# Altium PCB PCB1.PcbDoc
Units mil, origin at the board's own origin, x right, y up, seen from the top; angles counter-clockwise.
Board outline 6225 x 2457.36 mil, 2 copper layers (Top Layer, Bottom Layer); 191 components, 160 nets, 644 pads, 2 vias.
Unrouted connection lines stored in the file: 416.
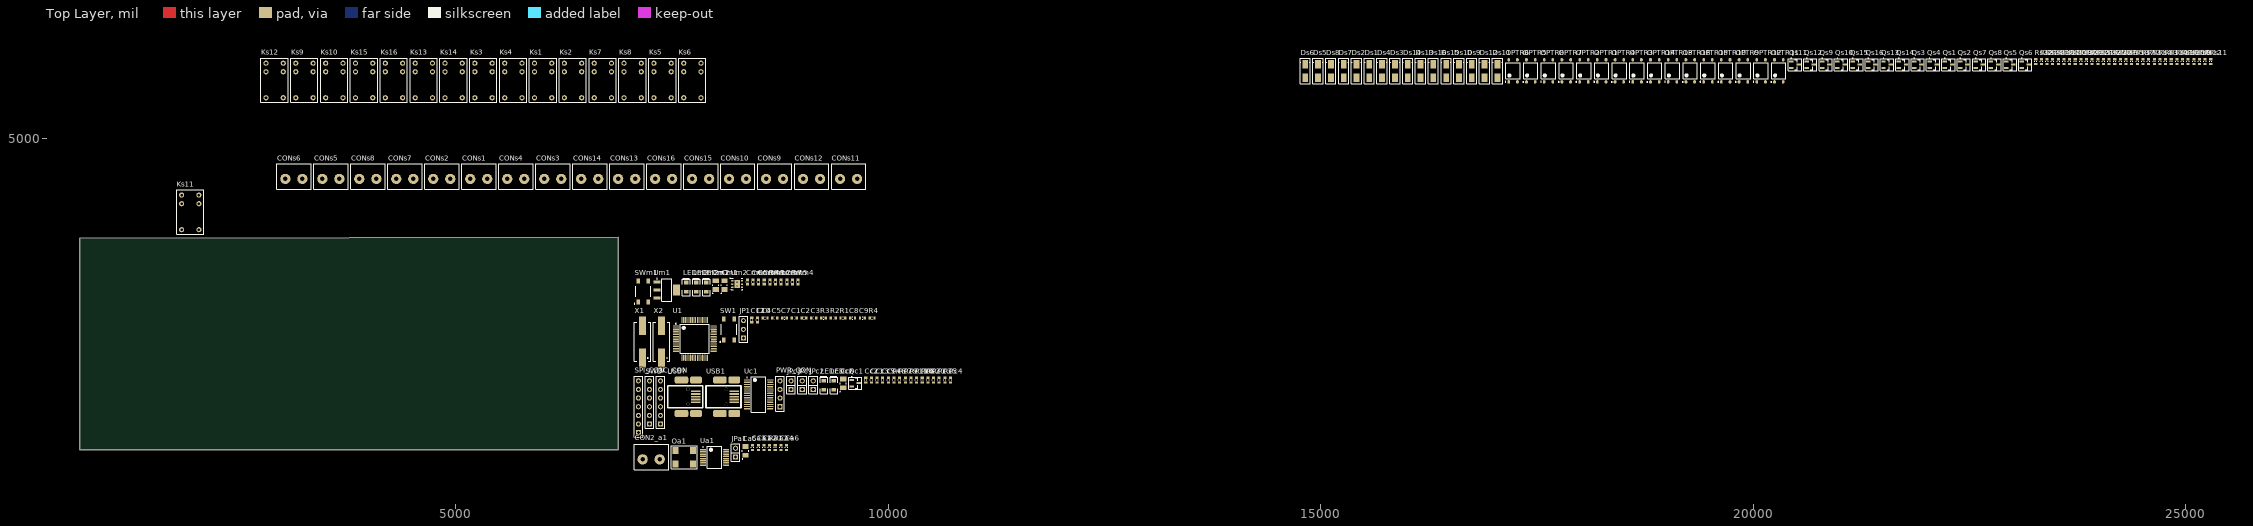
[diagram p0: Top Layer view]
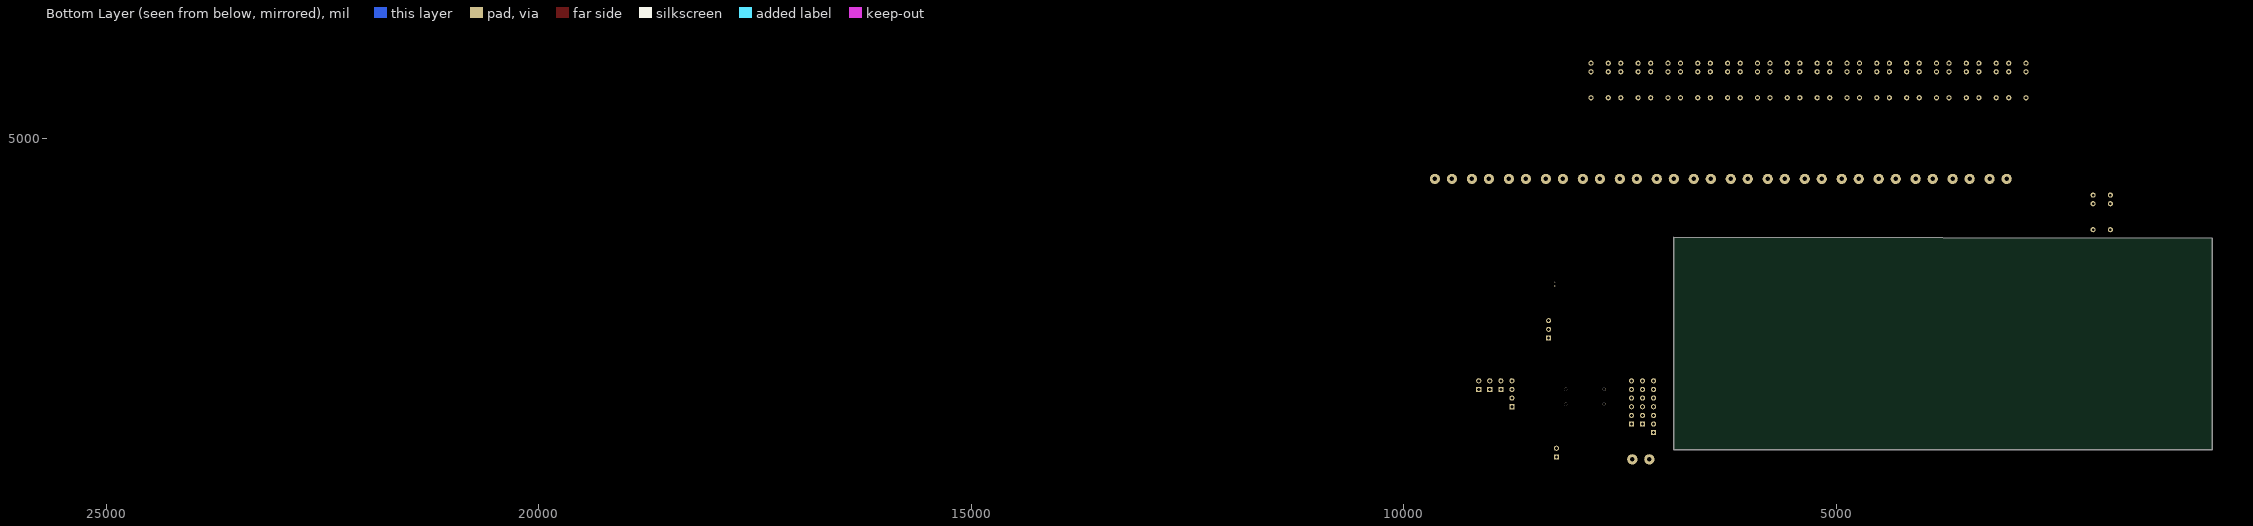
[diagram p1: Bottom Layer view, seen from below]

## Layer stack, top to bottom
Top Solder: solder mask 0.4, Solder Resist, Dk 3.5
Top Layer: signal copper 1.4
Dielectric 1: dielectric 12.6, FR-4, Dk 4.8
Bottom Layer: signal copper 1.4
Bottom Solder: solder mask 0.4, Solder Resist, Dk 3.5

## Board outline
650,3847.61 650,1405 6875,1405 6875,3862.36

## Design rules (kind name [scope] priority, off if disabled: settings)
Clearance [All] p1: gap=10 ignorepadtopadclearanceinfootprint=FALSE except(0: Arc-Hole Track-Hole SMDPad-Hole THPad-Hole Via-Hole Fill-Hole Poly-Hole Region-Hole Text-Hole)
PolygonConnect [All] p1: connectstyle=Relief reliefconductorwidth=10 reliefentries=4 polygonreliefangle="90 Angle" airgapwidth=10
RoomDefinition Misc [InComponentClass('Misc')] p1: confinementstyle=ConfineIn formatcopy=TRUE lockcomponents=FALSE outline 7045,2980 11630,2980 11630,3410 7045,3410
RoomDefinition MCU [InComponentClass('MCU')] p2: confinementstyle=ConfineIn formatcopy=TRUE lockcomponents=FALSE outline 7045,2260 10990,2260 10990,2970 7045,2970
RoomDefinition Connectors [InComponentClass('Connectors')] p3: confinementstyle=ConfineIn formatcopy=TRUE lockcomponents=FALSE outline 7045,1445 15690,1445 15690,2275 7045,2275
RoomDefinition Analiser [InComponentClass('Analiser')] p4: confinementstyle=ConfineIn formatcopy=TRUE lockcomponents=FALSE outline 7045,1065 10295,1065 10295,1495 7045,1495
RoutingVias [All] p1: holewidth=28 width=50 viastyle="Through Hole" minholewidth=28 minwidth=50 maxholewidth=28 maxwidth=50
SolderMaskExpansion [All] p1: expansion=4
Width [All] p1: maxlimit=10 minlimit=10 preferedwidth=10
30 further rules are at their usual default settings.

## Classes and differential pairs
net class PC[13..0]: PC0 PC1 PC2 PC3 PC4 PC5 PC6 PC7 PC8 PC9 PC10 PC11 PC12 PC13
component class Scanners: CONs1 CONs2 CONs3 CONs4 CONs5 CONs6 CONs7 CONs8 CONs9 CONs10 CONs11 CONs12 CONs13 CONs14 CONs15 CONs16 Ds1 Ds2 Ds3 Ds4 Ds5 Ds6 Ds7 Ds8 Ds9 Ds10 Ds11 Ds12 Ds13 Ds14 Ds15 Ds16 Ks1 Ks2 Ks3 Ks4 Ks5 Ks6 Ks7 Ks8 Ks9 Ks10 Ks11 Ks12 Ks13 Ks14 Ks15 Ks16 OPTR1 OPTR2 OPTR3 OPTR4 OPTR5 OPTR6 OPTR7 OPTR8 OPTR9 OPTR10 OPTR11 OPTR12 OPTR13 OPTR14 OPTR15 OPTR16 Qs1 Qs2 Qs3 Qs4 Qs5 Qs6 Qs7 Qs8 Qs9 Qs10 Qs11 Qs12 Qs13 Qs14 Qs15 Qs16 Rs1 Rs2 Rs3 Rs4 Rs5 Rs6 Rs7 Rs8 Rs9 Rs10 Rs11 Rs12 Rs13 Rs14 Rs15 Rs16 Rs17 Rs18 Rs19 Rs20 Rs21 Rs22 Rs23 Rs24 Rs25 Rs26 Rs27 Rs28 Rs29 Rs30 Rs31 Rs32
component class Misc: Cm1 Cm2 Cm3 Cm4 Cm5 Cm6 Cm7 LEDm1 LEDm2 LEDm3 Rm1 Rm2 Rm3 Rm4 Rm5 SWm1 Um1 Um2
component class MCU: C1 C2 C3 C4 C5 C7 C8 C9 C10 C12 JP1 R1 R2 R3 R4 SW1 U1 X1 X2
component class Connectors: Cc1 Cc2 Cc3 Cc4 Cc5 Cc6 I2C_CON JPc1 JPc2 JPc3 LEDc2 LEDc3 PWR_CON Qc1 Rc1 Rc2 Rc3 Rc4 Rc5 Rc6 Rc7 Rc8 Rc9 Rc10 Rc11 SPI_CON SWD Uc1 USB1 USB?
component class Analiser: Ca1 Ca2 Ca3 Ca4 Ca5 Ca6 CON2_a1 JPa1 Oa1 Ra1 Ra2 Ua1

## Components (designator, comment, footprint, x,y, rotation, side; value= is the part's Value field where it differs from the comment)
C1 "4.3p" CAPC0603(1608)100_L 8911.1,2927.36 r0 top
C2 "4.3p" CAPC0603(1608)100_L 9023.62,2927.36 r0 top
C3 "20pF" CAPC0603(1608)100_L 9136.14,2927.36 r0 top
C4 "20pF" CAPC0603(1608)100_L 8573.54,2927.36 r0 top
C5 "100n" CAPC0603(1608)100_L 8686.06,2927.36 r0 top
C7 "100n" CAPC0603(1608)100_L 8798.58,2927.36 r0 top
C8 "100n" CAPC0603(1608)100_L 9586.22,2927.36 r0 top
C9 "100n" CAPC0603(1608)100_L 9698.74,2927.36 r0 top
C10 "100n" CAPC0603(1608)100_L 8484.64,2903.74 r90 top
C12 "100n" CAPC0603(1608)100_L 8419.37,2903.74 r90 top
Ca1 "100n" CAPC0603(1608)100_L 8495.7,1428.74 r90 top
Ca2 "100n" CAPC0603(1608)100_L 8560.98,1428.74 r90 top
Ca3 "100n" CAPC0603(1608)100_L 8430.42,1428.74 r90 top
Ca4 "100n" CAPC0603(1608)100_L 8756.8,1428.74 r90 top
Ca5 "1uF" CAPMP3217X18-T_V 8347.43,1391.34 r90 top
Ca6 "0.1uF" CAPC0603(1608)100_L 8822.08,1428.74 r90 top
Cc1 "CAP0603" CAPC0603(1608)100_L 9803.1,2208.74 r90 top
Cc2 "100n" CAPC0603(1608)100_L 9737.83,2208.74 r90 top
Cc3 "100n" CAPC0603(1608)100_L 9868.38,2208.74 r90 top
Cc4 "100n" CAPC0603(1608)100_L 9998.93,2208.74 r90 top
Cc5 "100n" CAPC0603(1608)100_L 9933.65,2208.74 r90 top
Cc6 "10uF" CAPMP3217X18-T_V 9477.36,2171.34 r90 top
Cm1 "10uF" CAPMP3217X18-T_V 8103.75,3306.34 r90 top
Cm2 "10uF" CAPMP3217X18-T_V 8003.04,3306.34 r90 top
Cm3 "1uF" CAPC0603(1608)100_L 8498.71,3343.74 r90 top
Cm4 "100n" CAPC0603(1608)100_L 8563.98,3343.74 r90 top
Cm5 "1uF" CAPC0603(1608)100_L 8433.43,3343.74 r90 top
Cm6 "100n" CAPC0603(1608)100_L 8368.16,3343.74 r90 top
Cm7 "100n" CAPC0603(1608)100_L 8825.09,3343.74 r90 top
CON2_a1 "ARK2" ARK2 7060,1170.79 r0 top
CONs1 "ARK2" ARK2 5066.68,4412.95 r0 top
CONs2 "ARK2" ARK2 4639.13,4412.95 r0 top
CONs3 "ARK2" ARK2 5921.78,4412.95 r0 top
CONs4 "ARK2" ARK2 5494.23,4412.95 r0 top
CONs5 "ARK2" ARK2 3356.47,4412.95 r0 top
CONs6 "ARK2" ARK2 2928.92,4412.95 r0 top
CONs7 "ARK2" ARK2 4211.57,4412.95 r0 top
CONs8 "ARK2" ARK2 3784.02,4412.95 r0 top
CONs9 "ARK2" ARK2 8487.09,4412.95 r0 top
CONs10 "ARK2" ARK2 8059.54,4412.95 r0 top
CONs11 "ARK2" ARK2 9342.19,4412.95 r0 top
CONs12 "ARK2" ARK2 8914.64,4412.95 r0 top
CONs13 "ARK2" ARK2 6776.88,4412.95 r0 top
CONs14 "ARK2" ARK2 6349.33,4412.95 r0 top
CONs15 "ARK2" ARK2 7631.98,4412.95 r0 top
CONs16 "ARK2" ARK2 7204.43,4412.95 r0 top
Ds1 "D Schottky" SMA 15559.35,5784.53 r90 top
Ds2 "D Schottky" SMA 15411.24,5784.53 r90 top
Ds3 "D Schottky" SMA 15855.57,5784.53 r90 top
Ds4 "D Schottky" SMA 15707.46,5784.53 r90 top
Ds5 "D Schottky" SMA 14966.91,5784.53 r90 top
Ds6 "D Schottky" SMA 14818.8,5784.53 r90 top
Ds7 "D Schottky" SMA 15263.13,5784.53 r90 top
Ds8 "D Schottky" SMA 15115.02,5784.53 r90 top
Ds9 "D Schottky" SMA 16744.23,5784.53 r90 top
Ds10 "D Schottky" SMA 16596.12,5784.53 r90 top
Ds11 "D Schottky" SMA 17040.45,5784.53 r90 top
Ds12 "D Schottky" SMA 16892.34,5784.53 r90 top
Ds13 "D Schottky" SMA 16151.79,5784.53 r90 top
Ds14 "D Schottky" SMA 16003.68,5784.53 r90 top
Ds15 "D Schottky" SMA 16448.01,5784.53 r90 top
Ds16 "D Schottky" SMA 16299.9,5784.53 r90 top
I2C_CON "HDR1X6" HDR1X6 7364.69,1701.06 r90 top
JP1 "HDR1X3" HDR1X3 8322.79,2696.06 r90 top
JPa1 "Jumper" "HDR1X2 - JP" 8183.14,1371.06 r90 top
JPc1 "Jumper" "HDR1X2 - JP" 8953.19,2151.06 r90 top
JPc2 "Jumper" "HDR1X2 - JP" 9081.06,2151.06 r90 top
JPc3 "Jumper" "HDR1X2 - JP" 8825.32,2151.06 r90 top
Ks1 "Relay-SPDT" Relay_m1 5908.21,5873.11 r0 top
Ks2 "Relay-SPDT" Relay_m1 6253.17,5873.11 r0 top
Ks3 "Relay-SPDT" Relay_m1 5218.29,5873.11 r0 top
Ks4 "Relay-SPDT" Relay_m1 5563.25,5873.11 r0 top
Ks5 "Relay-SPDT" Relay_m1 7288.06,5873.11 r0 top
Ks6 "Relay-SPDT" Relay_m1 7633.02,5873.11 r0 top
Ks7 "Relay-SPDT" Relay_m1 6598.13,5873.11 r0 top
Ks8 "Relay-SPDT" Relay_m1 6943.09,5873.11 r0 top
Ks9 "Relay-SPDT" Relay_m1 3148.53,5873.11 r0 top
Ks10 "Relay-SPDT" Relay_m1 3493.49,5873.11 r0 top
Ks11 "Relay-SPDT" Relay_m1 1828.29,4348.11 r0 top
Ks12 "Relay-SPDT" Relay_m1 2803.57,5873.11 r0 top
Ks13 "Relay-SPDT" Relay_m1 4528.37,5873.11 r0 top
Ks14 "Relay-SPDT" Relay_m1 4873.33,5873.11 r0 top
Ks15 "Relay-SPDT" Relay_m1 3838.45,5873.11 r0 top
Ks16 "Relay-SPDT" Relay_m1 4183.41,5873.11 r0 top
LEDc2 "RED" 0805_DIODE 9369,2090 r90 top
LEDc3 "RED" 0805_DIODE 9253,2090 r90 top
LEDm1 "RED" 0805_DIODE 7894.69,3225 r90 top
LEDm2 "RED" 0805_DIODE 7778.69,3225 r90 top
LEDm3 "RED" 0805_DIODE 7662.69,3225 r90 top
Oa1 "Clock Oscillator" "Oscillator SMD" 7540,1395 r0 top
OPTR1 "FODM121R2" "FAIR-MFP 4L_V" 18245.96,5784.61 r90 top
OPTR2 "FODM121R2" "FAIR-MFP 4L_V" 18041.12,5784.61 r90 top
OPTR3 "FODM121R2" "FAIR-MFP 4L_V" 18655.65,5784.61 r90 top
OPTR4 "FODM121R2" "FAIR-MFP 4L_V" 18450.8,5784.61 r90 top
OPTR5 "FODM121R2" "FAIR-MFP 4L_V" 17426.59,5784.61 r90 top
OPTR6 "FODM121R2" "FAIR-MFP 4L_V" 17221.75,5784.61 r90 top
OPTR7 "FODM121R2" "FAIR-MFP 4L_V" 17836.28,5784.61 r90 top
OPTR8 "FODM121R2" "FAIR-MFP 4L_V" 17631.43,5784.61 r90 top
OPTR9 "FODM121R2" "FAIR-MFP 4L_V" 19884.7,5784.61 r90 top
OPTR10 "FODM121R2" "FAIR-MFP 4L_V" 19679.86,5784.61 r90 top
OPTR11 "FODM121R2" "FAIR-MFP 4L_V" 20294.39,5784.61 r90 top
OPTR12 "FODM121R2" "FAIR-MFP 4L_V" 20089.54,5784.61 r90 top
OPTR13 "FODM121R2" "FAIR-MFP 4L_V" 19065.33,5784.61 r90 top
OPTR14 "FODM121R2" "FAIR-MFP 4L_V" 18860.49,5784.61 r90 top
OPTR15 "FODM121R2" "FAIR-MFP 4L_V" 19475.02,5784.61 r90 top
OPTR16 "FODM121R2" "FAIR-MFP 4L_V" 19270.17,5784.61 r90 top
PWR_CON "HDR1X4" HDR1X4 8747.44,1901.06 r90 top
Qc1 "BC817-25" SOT23_N 9616.45,2174.29 r0 top
Qs1 "BC817-25" SOT23_N 22255.53,5856.46 r0 top
Qs2 "BC817-25" SOT23_N 22433.01,5856.46 r0 top
Qs3 "BC817-25" SOT23_N 21900.57,5856.46 r0 top
Qs4 "BC817-25" SOT23_N 22078.05,5856.46 r0 top
Qs5 "BC817-25" SOT23_N 22965.45,5856.46 r0 top
Qs6 "BC817-25" SOT23_N 23142.93,5856.46 r0 top
Qs7 "BC817-25" SOT23_N 22610.49,5856.46 r0 top
Qs8 "BC817-25" SOT23_N 22787.97,5856.46 r0 top
Qs9 "BC817-25" SOT23_N 20835.69,5856.46 r0 top
Qs10 "BC817-25" SOT23_N 21013.17,5856.46 r0 top
Qs11 "BC817-25" SOT23_N 20480.73,5856.46 r0 top
Qs12 "BC817-25" SOT23_N 20658.21,5856.46 r0 top
Qs13 "BC817-25" SOT23_N 21545.61,5856.46 r0 top
Qs14 "BC817-25" SOT23_N 21723.09,5856.46 r0 top
Qs15 "BC817-25" SOT23_N 21190.65,5856.46 r0 top
Qs16 "BC817-25" SOT23_N 21368.13,5856.46 r0 top
R1 "0R" RESC0603(1608)_L 9473.7,2927.36 r0 top
R2 "0R" RESC0603(1608)_L 9361.18,2927.36 r0 top
R3 "0R" RESC0603(1608)_L 9248.66,2927.36 r0 top
R4 "0R" RESC0603(1608)_L 9811.25,2927.36 r0 top
Ra1 "2k" RESC0603(1608)_L 8626.25,1428.74 r90 top
Ra2 "0R" RESC0603(1608)_L 8691.53,1428.74 r90 top
Rc1 "0R" RESC0603(1608)_L 10521.13,2208.74 r90 top
Rc2 "0R" RESC0603(1608)_L 10455.86,2208.74 r90 top
Rc3 "0R" RESC0603(1608)_L 10586.41,2208.74 r90 top
Rc4 "0R" RESC0603(1608)_L 10716.96,2208.74 r90 top
Rc5 "3k3" RESC0603(1608)_L 10651.68,2208.74 r90 top
Rc6 "22R" RESC0603(1608)_L 10390.58,2208.74 r90 top
Rc7 "22R" RESC0603(1608)_L 10129.48,2208.74 r90 top
Rc8 "1k5" RESC0603(1608)_L 10064.21,2208.74 r90 top
Rc9 "10k" RESC0603(1608)_L 10194.76,2208.74 r90 top
Rc10 "3k3" RESC0603(1608)_L 10325.31,2208.74 r90 top
Rc11 "3k3" RESC0603(1608)_L 10260.03,2208.74 r90 top
Rm1 "RES0603" RESC0603(1608)_L 8629.26,3343.74 r90 top
Rm2 "3k3" RESC0603(1608)_L 8694.53,3343.74 r90 top
Rm3 "3k3" RESC0603(1608)_L 8759.81,3343.74 r90 top
Rm4 "4k7" RESC0603(1608)_L 8955.64,3343.74 r90 top
Rm5 "100R" RESC0603(1608)_L 8890.36,3343.74 r90 top
Rs1 "3k3" RESC0603(1608)_L 24635.09,5890.91 r90 top
Rs2 "10k" RESC0603(1608)_L 24569.82,5890.91 r90 top
Rs3 "3k3" RESC0603(1608)_L 24765.64,5890.91 r90 top
Rs4 "10k" RESC0603(1608)_L 24700.37,5890.91 r90 top
Rs5 "3k3" RESC0603(1608)_L 24373.99,5890.91 r90 top
Rs6 "10k" RESC0603(1608)_L 24308.72,5890.91 r90 top
Rs7 "3k3" RESC0603(1608)_L 24504.54,5890.91 r90 top
Rs8 "10k" RESC0603(1608)_L 24439.27,5890.91 r90 top
Rs9 "3k3" RESC0603(1608)_L 25157.3,5890.91 r90 top
Rs10 "10k" RESC0603(1608)_L 25092.02,5890.91 r90 top
Rs11 "3k3" RESC0603(1608)_L 25287.85,5890.91 r90 top
Rs12 "10k" RESC0603(1608)_L 25222.57,5890.91 r90 top
Rs13 "3k3" RESC0603(1608)_L 24896.2,5890.91 r90 top
Rs14 "10k" RESC0603(1608)_L 24830.92,5890.91 r90 top
Rs15 "3k3" RESC0603(1608)_L 25026.75,5890.91 r90 top
Rs16 "10k" RESC0603(1608)_L 24961.47,5890.91 r90 top
Rs17 "3k3" RESC0603(1608)_L 23590.69,5890.91 r90 top
Rs18 "10k" RESC0603(1608)_L 23525.41,5890.91 r90 top
Rs19 "3k3" RESC0603(1608)_L 23721.24,5890.91 r90 top
Rs20 "10k" RESC0603(1608)_L 23655.96,5890.91 r90 top
Rs21 "3k3" RESC0603(1608)_L 23329.58,5890.91 r90 top
Rs22 "10k" RESC0603(1608)_L 23264.31,5890.91 r90 top
Rs23 "3k3" RESC0603(1608)_L 23460.13,5890.91 r90 top
Rs24 "10k" RESC0603(1608)_L 23394.86,5890.91 r90 top
Rs25 "3k3" RESC0603(1608)_L 24112.89,5890.91 r90 top
Rs26 "10k" RESC0603(1608)_L 24047.61,5890.91 r90 top
Rs27 "3k3" RESC0603(1608)_L 24243.44,5890.91 r90 top
Rs28 "10k" RESC0603(1608)_L 24178.16,5890.91 r90 top
Rs29 "3k3" RESC0603(1608)_L 23851.79,5890.91 r90 top
Rs30 "10k" RESC0603(1608)_L 23786.51,5890.91 r90 top
Rs31 "3k3" RESC0603(1608)_L 23982.34,5890.91 r90 top
Rs32 "10k" RESC0603(1608)_L 23917.06,5890.91 r90 top
SPI_CON "HDR1X7" HDR1X7 7108.94,1601.06 r90 top
SW1 "TVCM01-038B" JNFU-TVCM01-038B_V 8156.34,2794.43 r90 top
SWD "HDR1X6" HDR1X6 7236.81,1701.06 r90 top
SWm1 "TVCM01-038B" JNFU-TVCM01-038B_V 7165.24,3234.43 r90 top
U1 "STM32F103RBT6TR" LQFP64_N 7761.34,2685.24 r0 top
Ua1 "AD5933YRSZ" ADI-RS-16_L 7990,1315 r0 top
Uc1 "FT232RL-Reel" SSOP-28_L 8499.29,2043.39 r0 top
Um1 "LD1117S50TR" SOT-223_L 7436.22,3250.24 r0 top
Um2 "LD39050PU33R" DFN6D_L 8250.72,3319.13 r0 top
USB1 "67503-1020" MOLX-67503-1020_V 8216.5,2079.74 r0 top
USB? "67503-1020" MOLX-67503-1020_V 7773.27,2079.74 r0 top
X1 "8MHz" HC49/4H_SMX 7155.39,2650.72 r90 top
X2 "8MHz" HC49/4H_SMX 7376.18,2650.72 r90 top

## Footprints (in the part's own frame and the unit in brackets; to place one, negate y for a bottom-side part, rotate by r counter-clockwise, add the part's x,y. Pads: shape width x height; smd on the part's side, far side on the other; paste and mask are expansions set on the pad)
0805_DIODE [mm]
  rect 1.05x1.3 smd: 1(0.127,0) 2(2.858,0)
  silkscreen extent -0.98,-1.12 4.09,1.12, body extent 0.41,-0.64 2.43,0.64, height 0.81
ADI-RS-16_L [mm] "SOP, 16-Leads, Body 6.2x5.3mm, Pitch 0.65mm, IPC High Density"
  oval 1.8x0.45 smd: 1(-3.4,2.275) 2(-3.4,1.625) 3(-3.4,0.975) 4(-3.4,0.325) 5(-3.4,-0.325) 6(-3.4,-0.975) 7(-3.4,-1.625) 8(-3.4,-2.275) 9(3.4,-2.275) 10(3.4,-1.625) 11(3.4,-0.975) 12(3.4,-0.325) 13(3.4,0.325) 14(3.4,0.975) 15(3.4,1.625) 16(3.4,2.275)
  silkscreen extent -3.52,-3.25 2.1,3.25, body extent -2.8,-3.25 2.8,3.25, height 2
ARK2 [mm]
  round 3 hole 1.3: 1(2.5,3.1) 2(7.5,3.1)
  silkscreen extent 0,0 10.1,7.6, body extent 0,0 10,7.6, height 10
CAPC0603(1608)100_L [mm]
  rect 0.7x0.9 smd: 1(-0.7,0) 2(0.7,0)
  silkscreen extent -0.05,-0.35 0.05,0.35, body extent -0.87,-0.47 0.88,0.48, height 1
CAPMP3217X18-T_V [mm] "Molded Capacitor, 2-Leads, Body 3.40x1.8mm"
  rect 1.4x1.8 smd: 1(-1.3,0) 2(1.3,0)
  silkscreen extent -2.45,-0.9 0.2,0.95, body extent -1.92,-0.9 1.92,0.9, height 1.8
DFN6D_L [mm] "SON, 6-Leads, Body 3x3mm, Pitch 0.95mm, Thermal Pad 2.4x1.65mm, IPC High Density"
  oval 0.7x0.4 smd: 1(-1.425,0.95) 2(-1.425,0) 3(-1.425,-0.95) 4(1.425,-0.95) 5(1.425,0) 6(1.425,0.95)
  rect 1.65x2.4 smd: 7(0,0)
  silkscreen extent -2.15,-1.7 1.7,1.75, body extent -1.55,-1.55 1.55,1.55, height 0.95
"FAIR-MFP 4L_V" [mm] "SOP, 4-Leads, Body 4.2x4.6mm, Pitch 2.54mm"
  oval 1x0.8 smd: 1(-3.25,1.27) 2(-3.25,-1.27) 3(3.25,-1.27) 4(3.25,1.27)
  silkscreen extent -3.37,-2.1 2.35,2.34, body extent -3.39,-1.92 3.39,1.93, height 2.4
HC49/4H_SMX [mm]
  rect 5.5x2 smd: 1(-4.75,0) 2(4.75,0)
  silkscreen extent -5.7,-2.45 5.7,2.45, body extent -6.3,-2.3 6.2,2.35, height 3.9
"HDR1X2 - JP" [mm] "Connector; Header; 2 Position, Jumper"
  rect 1.5x1.5 hole 0.9: 1(-1.27,-1.27)
  round 1.5 hole 0.9: 2(1.27,-1.27)
  silkscreen extent -2.54,-2.54 2.54,0, body extent -2.54,-2.51 2.54,0.03, height 8.54
HDR1X3 [mm] "Connector; Header; 3 Position"
  rect 1.5x1.5 hole 0.9: 1(0,0)
  round 1.5 hole 0.9: 2(2.54,0) 3(5.08,0)
  silkscreen extent -1.27,-1.27 6.35,1.27, body extent -1.27,-1.24 6.35,1.3, height 8.54
HDR1X4 [mm] "Connector; Header; 4 Position"
  rect 1.5x1.5 hole 0.9: 1(0,0)
  round 1.5 hole 0.9: 2(2.54,0) 3(5.08,0) 4(7.62,0)
  silkscreen extent -1.27,-1.27 8.89,1.27, body extent -1.27,-1.27 8.89,1.27, height 8.54
HDR1X6 [mm] "Connector; Header; 6 Position"
  rect 1.5x1.5 hole 0.9: 1(0,0)
  round 1.5 hole 0.9: 2(2.54,0) 3(5.08,0) 4(7.62,0) 5(10.16,0) 6(12.7,0)
  silkscreen extent -1.27,-1.27 13.97,1.27, body extent -1.27,-1.27 13.97,1.27, height 8.54
HDR1X7 [mm] "Connector; Header; 7 Position"
  rect 1.5x1.5 hole 0.9: 1(0,0)
  round 1.5 hole 0.9: 2(2.54,0) 3(5.08,0) 4(7.62,0) 5(10.16,0) 6(12.7,0) 7(15.24,0)
  silkscreen extent -1.27,-1.27 16.51,1.27, body extent -1.27,-1.24 16.51,1.3, height 8.54
JNFU-TVCM01-038B_V [mm] "Surface Mount Switch, 4.5 x 4.5 mm Body"
  rect 1.5x1 smd: 1(-3.1,1.5) 2(3.1,1.5) 3(-3.1,-1.5) 4(3.1,-1.5)
  silkscreen extent -3.77,-2.25 1.52,2.67, body extent -2.25,-2.25 2.25,2.25, height 3.8
LQFP64_N [mm] "Thin QFP, 64-Leads, Body 10x10mm, Pitch 0.5mm, IPC Medium Density"
  oval 1.8x0.3 smd: 1(-5.55,3.75) 2(-5.55,3.25) 3(-5.55,2.75) 4(-5.55,2.25) 5(-5.55,1.75) 6(-5.55,1.25) 7(-5.55,0.75) 8(-5.55,0.25) 9(-5.55,-0.25) 10(-5.55,-0.75) 11(-5.55,-1.25) 12(-5.55,-1.75) 13(-5.55,-2.25) 14(-5.55,-2.75) 15(-5.55,-3.25) 16(-5.55,-3.75) 33(5.55,-3.75) 34(5.55,-3.25) 35(5.55,-2.75) 36(5.55,-2.25) 37(5.55,-1.75) 38(5.55,-1.25) 39(5.55,-0.75) 40(5.55,-0.25) 41(5.55,0.25) 42(5.55,0.75) 43(5.55,1.25) 44(5.55,1.75) 45(5.55,2.25) 46(5.55,2.75) 47(5.55,3.25) 48(5.55,3.75)
  oval 0.3x1.8 smd: 17(-3.75,-5.55) 18(-3.25,-5.55) 19(-2.75,-5.55) 20(-2.25,-5.55) 21(-1.75,-5.55) 22(-1.25,-5.55) 23(-0.75,-5.55) 24(-0.25,-5.55) 25(0.25,-5.55) 26(0.75,-5.55) 27(1.25,-5.55) 28(1.75,-5.55) 29(2.25,-5.55) 30(2.75,-5.55) 31(3.25,-5.55) 32(3.75,-5.55) 49(3.75,5.55) 50(3.25,5.55) 51(2.75,5.55) 52(2.25,5.55) 53(1.75,5.55) 54(1.25,5.55) 55(0.75,5.55) 56(0.25,5.55) 57(-0.25,5.55) 58(-0.75,5.55) 59(-1.25,5.55) 60(-1.75,5.55) 61(-2.25,5.55) 62(-2.75,5.55) 63(-3.25,5.55) 64(-3.75,5.55)
  silkscreen extent -5.67,-4.25 4.25,4.57, body extent -5,-5 5,5, height 1.6
MOLX-67503-1020_V [mm] "Mini USB Connector, SMT, Righer Angle"
  rrect50% 2.8x0.5 smd: 1(0,0) 2(0,-0.8) 3(0,-1.6) 4(0,-2.4) 5(0,-3.2)
  rrect50% 3.5x2.05 smd: 6(0.025,3.325) 8(0.025,-6.525)
  rrect50% 4x2.05 smd: 7(-4.225,3.325) 9(-4.225,-6.525)
  round 0.9 hole 0.9 unplated: X(-2.325,-3.8) Y(-2.325,0.6)
  silkscreen extent -8.25,-4.85 2,1.65, body extent -8.22,-6.56 0.78,3.34, height 3.95
"Oscillator SMD" [mm] "5x7mm 1.8MHz Crystal"
  rect 1.8x2 smd: 1(0,-4) 2(5.075,-4) 3(5.075,0) 4(0,0)
  silkscreen extent -1.25,-5.38 6.32,1.38
Relay_m1 [mil]
  round 60 hole 30: 1(0,-400) 1(200,-400) 2(200,0) 3(0,0) 4(0,-100) 5(200,-100)
  silkscreen extent -59,-453 256,59
RESC0603(1608)_L [mm]
  rect 0.7x0.9 smd: 1(-0.7,0) 2(0.7,0)
  silkscreen extent -0.05,-0.35 0.05,0.35, body extent -0.85,-0.47 0.85,0.47, height 0.6
SMA [mm] "Molded Diode, 2-Leads, Body 4,3x2,7mm, IPC Medium Density"
  rect 2.5x1.7 smd: 1(-2,0) 2(2,0)
  silkscreen extent -3.75,-1.5 3.75,1.5, body extent -2.6,-1.4 2.6,1.4, height 2.21
SOT23_N [mm]
  rect 1.3x0.6 smd: 1(-1.05,0.95) 2(-1.05,-0.95) 3(1.05,0)
  silkscreen extent -1.95,-1.75 1.95,1.92, body extent -1.6,-1.5 1.6,1.5, height 1.1
SOT-223_L [mm] "SOT223, 4-Leads, Body 6.5x3.5mm, Pitch 2.3mm, Lead Span 7mm, IPC High Density"
  rect 2.1x0.9 smd: 1(-2.85,2.3) 2(-2.85,0) 3(-2.85,-2.3)
  rect 2.1x3.2 smd: 4(2.85,0)
  silkscreen extent -2.97,-3.35 1.5,3.42, body extent -1.85,-3.35 1.85,3.35, height 1.8
SSOP-28_L [mm] "SOP, 28-Leads, Body 10.2x5.3mm, Pitch 0.65mm, IPC High Density"
  oval 1.8x0.35 smd: 1(-3.4,4.225) 2(-3.4,3.575) 3(-3.4,2.925) 4(-3.4,2.275) 5(-3.4,1.625) 6(-3.4,0.975) 7(-3.4,0.325) 8(-3.4,-0.325) 9(-3.4,-0.975) 10(-3.4,-1.625) 11(-3.4,-2.275) 12(-3.4,-2.925) 13(-3.4,-3.575) 14(-3.4,-4.225) 15(3.4,-4.225) 16(3.4,-3.575) 17(3.4,-2.925) 18(3.4,-2.275) 19(3.4,-1.625) 20(3.4,-0.975) 21(3.4,-0.325) 22(3.4,0.325) 23(3.4,0.975) 24(3.4,1.625) 25(3.4,2.275) 26(3.4,2.925) 27(3.4,3.575) 28(3.4,4.225)
  silkscreen extent -3.52,-5.25 2.1,5.25, body extent -2.8,-5.25 2.8,5.25, height 2

## Part data
C1 C2 C3 C4 C5 C7 C8 C9 C10 C12 Ca1 Ca2 Ca3 Ca4 Ca6 Cc1 Cc2 Cc3 Cc4 Cc5 Cm3 Cm4 Cm5 Cm6 Cm7: library part CMP-1590-00005-1, "0603 (1608 Metric) Chip Capacitor", Case-EIA=0603, Case-Metric=1608, PackageReference=CAPC0603(1608)100
Ca5 Cc6 Cm1 Cm2: library part CMP-1661-00003-1, "Standard Tantalum, 1 uF, +/- 10%, 35 V, -55 to 125 degC, 2-Pin SMD (1206), RoHS, Tape and Reel", Current Rating="200 mA", Max Operating Temperature="70 degC", Min Operating Temperature="-20 degC", Package Quantity=1000, Voltage Rating (DC)="30 V", ComponentLink1Description="Manufacturer URL", ComponentLink1URL=http://www.avx.com/, ComponentLink2Description=Datasheet, ComponentLink2URL=http://datasheets.avx.com/TAJ.pdf, ComponentLink3Description="Package Specification", ComponentLink3URL=http://www.avx.com/download/software/literature/AVX-Footprint-Library.pdf, Contact Finish=Silver, Contact Material=Copper, Contact Plating=Silver, DatasheetVersion=Feb-16, Height="7.4 mm", Length="11.6 mm", Mount="Through Hole", PackageDescription="2-Pin Surface Mount Device, Body 3.2 x 1.65 mm", PackageReference=CAPMP3217X18-T, Packaging=Bulk, Pins=3, REACH SVHC="No SVHC", RoHSCompliant=true, Width="4 mm"
CON2_a1 CONs1 CONs2 CONs3 CONs4 CONs5 CONs6 CONs7 CONs8 CONs9 CONs10 CONs11 CONs12 CONs13 CONs14 CONs15 CONs16: "Z彻cze 渞ubowe 2 piny"
Ds1 Ds2 Ds3 Ds4 Ds5 Ds6 Ds7 Ds8 Ds9 Ds10 Ds11 Ds12 Ds13 Ds14 Ds15 Ds16: "Schottky Diode", Code_JEDEC=DO-214-AA, LatestRevisionDate=17-Jul-2002, LatestRevisionNote="Re-released for DXP Platform.", PackageDescription="DO-214-AA/SMB; 2 C-Bend Leads; Body 5.3 x 3.6 mm, inc. leads (LxW)", PackageReference=SMB, Published=8-Jun-2000, Publisher="Altium Limited"
I2C_CON SWD: "Header, 6-Pin", LatestRevisionDate=17-Jul-2002, LatestRevisionNote="Re-released for DXP Platform.", Publisher="Altium Limited"
JP1: "Header, 3-Pin", LatestRevisionDate=17-Jul-2002, LatestRevisionNote="Re-released for DXP Platform.", Publisher="Altium Limited"
JPa1 JPc1 JPc2 JPc3: library part Jumper_2, "Jumper, 2-Pin"
Ks1 Ks2 Ks3 Ks4 Ks5 Ks6 Ks7 Ks8 Ks9 Ks10 Ks11 Ks12 Ks13 Ks14 Ks15 Ks16: "Single-Pole Dual-Throw Relay", LatestRevisionDate=17-Jul-2002, LatestRevisionNote="Re-released for DXP Platform.", PackageReference=MODULE5B, Published=24-Mar-1999, Publisher="Altium Limited"
LEDc2 LEDc3 LEDm1 LEDm2 LEDm3: library part LED, "Light-emitting diode", COLOR=RED
Oa1: "1.8MHz Clock Source SMD"
OPTR1 OPTR2 OPTR3 OPTR4 OPTR5 OPTR6 OPTR7 OPTR8 OPTR9 OPTR10 OPTR11 OPTR12 OPTR13 OPTR14 OPTR15 OPTR16: library part CMP-1569-00003-1, "Transistor Output Optocoupler, 1 to 1.3 V, -40 to 110 degC, 4-Pin SOP (MFP 4L), RoHS, Tape and Reel", Forward Voltage Max="1.3 V", Forward Voltage Min="1 V", PartNumber=FODM121, Temperature Max="110 degC", Temperature Min="-40 degC", ComponentLink1Description="Manufacturer URL", ComponentLink1URL=https://www.fairchildsemi.com/, ComponentLink2Description=Datasheet, ComponentLink2URL=https://www.fairchildsemi.com/datasheets/FO/FODM121.pdf, ComponentLink3Description="Package Specification", ComponentLink3URL=https://www.fairchildsemi.com/package-drawings/MF/MFP04C.pdf, DatasheetVersion="Rev. 1.1.4", Mounting Technology="Surface Mount", PackageDescription="4-Pin Mini Flat Package, Body 3.85 x 4.4 mm, Pitch 2.54 mm", Packing="Tape and Reel", RoHS=TRUE, VCE Saturation Max="0.4 V"
PWR_CON: "Header, 4-Pin", LatestRevisionDate=17-Jul-2002, LatestRevisionNote="Re-released for DXP Platform.", Publisher="Altium Limited"
Qc1 Qs1 Qs2 Qs3 Qs4 Qs5 Qs6 Qs7 Qs8 Qs9 Qs10 Qs11 Qs12 Qs13 Qs14 Qs15 Qs16: "NPN General-purpose Transistor", ComponentLink1Description="Manufacturer Link", ComponentLink1URL=http://www.semiconductors.philips.com/, ComponentLink2Description=Datasheet, ComponentLink2URL=http://www.semiconductors.philips.com/acrobat/datasheets/BC817_BC817W_BC337_5.pdf, DatasheetVersion=Jun-1999, LatestRevisionDate=12-Dec-2006, LatestRevisionNote="IPC-7351 Footprint Added.", PackageDescription="3-Pin SOT-23 Package 0.95 mm Pitch, 2.3 mm Lead Span", PackageReference=SOT23, PackageVersion=May-1999, Published=17-Sep-2003, Publisher="Altium Limited"
R1 R2 R3 R4 Ra1 Ra2 Rc1 Rc2 Rc3 Rc4 Rc5 Rc6 Rc7 Rc8 Rc9 Rc10 Rc11 Rm1 Rm2 Rm3 Rm4 Rm5 Rs1 Rs2 Rs3 Rs4 Rs5 Rs6 Rs7 Rs8 Rs9 Rs10 Rs11 Rs12 Rs13 Rs14 Rs15 Rs16 Rs17 Rs18 Rs19 Rs20 Rs21 Rs22 Rs23 Rs24 Rs25 Rs26 Rs27 Rs28 Rs29 Rs30 Rs31 Rs32: library part CMP-1591-00001-1, "0603 (1608 Metric) Chip Resistor", Case-EIA=0603, Case-Metric=1608, PackageReference=RESC0603(1608)
SPI_CON: "Header, 7-Pin", LatestRevisionDate=17-Jul-2002, LatestRevisionNote="Re-released for DXP Platform.", Publisher="Altium Limited"
SW1 SWm1: library part CMP-0224-00001-1, "Switch, Push Button, 50 mA, 12V DC, SMD", Case Size="4.5 x 4.5", Operating Temperature="-30 to 85 degC", ComponentLink1Description="Manufacturer URL", ComponentLink1URL=http://www.jian-fu.com/, ComponentLink2Description=Datasheet, ComponentLink2URL=http://www.jian-fu.com/product-61.html, Mechanical Life="100,000 cycles", Mounting Technology="Suface Mount", PackageDescription="4-Pin Surface Mount Switch, 4.5 x 4.5 mm Body", PackageReference=TVCM01-038B, PartNumber=TVCM01-038B
U1: library part CMP-0237-00169-1, "STM32 ARM-based 32-bit MCU Performance Line with 128 kB Flash, 20 kB Internal RAM, -40 to +85癈 Temperature, 64-Pin LQFP, Tape and Reel", ComponentLink1Description="STM32F103 Datasheet", ComponentLink1URL=http://www.st.com/internet/com/TECHNICAL_RESOURCES/TECHNICAL_LITERATURE/DATASHEET/CD00161566.pdf, ComponentLink2Description="STM32 Family Web Page", ComponentLink2URL=www.st.com/stm32, ComponentLink3Description="st.com Home", ComponentLink3URL=http://www.st.com/internet/com/home/home.jsp, DatasheetVersion="rev13.0, Apr-2011", PackageDescription="64-Pin Low-Profile Quad Flat Pack, 10 x 10 mm Body, 0.5 mm Pitch (LQFP64)", PackageReference=LQFP64, PackageVersion="rev13, Apr-2011"
Ua1: library part CMP-0293-00046-1, "1 MSPS, 12-Bit Impedance Converter, Network Analyzer, Serial, RS-16, 77 Tube, Pb-Free", Code_JEDEC=MO-150-AC, ComponentLink1Description="Manufacturer URL", ComponentLink1URL=www.analog.com, ComponentLink2Description=Datasheet, ComponentLink2URL=http://www.analog.com/static/imported-files/data_sheets/AD5933.pdf, ComponentLink3Description="Package Specification", ComponentLink3URL=http://www.analog.com/static/imported-files/packages/31572257652246RS_16.pdf, DatasheetVersion="Rev. D", I/O Interface=Serial, I Supply total (max)=15mA, Master fclk=16.776MHz, PackageDescription="16-Lead Shrink Small Outline Package [SSOP]", PackageReference=RS-16, PackageVersion=3/17/2005, Resolution (Bits)=12bit, Tuning Word Width (bits)=27bit
Uc1: library part CMP-0078-00029-3, "USB UART Asynchronous Serial Data Transfer Chip, 28-pin SSOP, Tape and Reel", Manufacturer=FTDI, ComponentLink1Description="Manufacturer URL", ComponentLink1URL=http://www.ftdichip.com/, ComponentLink2Description=Datasheet, ComponentLink2URL=http://www.ftdichip.com/Support/Documents/DataSheets/ICs/DS_FT232R.pdf, DatasheetVersion="ver 2.10, Mar-2012", PackageDescription="28-Pin Small Outline Package 0.65 mm Pitch", PackageReference=SSOP-28, PackageVersion=Mar-12, PartNumber=FT232RL-Reel, RevisionNote="DatasheetVersion updated to 2.10 Mar-2012"
Um1: library part CMP-0244-00312-1, "Fixed Low Drop Positive Voltage Regulator, 5V, 4-Pin SOT-223, Tape and Reel", ComponentLink1Description="Manufacturer URL", ComponentLink1URL=http://www.st.com, ComponentLink2Description=Datasheet, ComponentLink2URL=http://www.st.com/internet/com/TECHNICAL_RESOURCES/TECHNICAL_LITERATURE/DATASHEET/CD00000544.pdf, DatasheetVersion=1/11/2011, PackageDescription="4-Pin SOT-223 Package, 6.5 x 3.5 mm Body, 2.3 mm Pitch, 7 mm Lead Span", PackageReference=SOT-223, PackageVersion=2010
Um2: library part CMP-0244-00288-1, "500 mA Low Quiescent Current Low Noise Voltage Regulator, 3.3V, 6-Pin VDFDPN, Tape and Reel", ComponentLink1Description="Manufacturer URL", ComponentLink1URL=http://www.st.com, ComponentLink2Description=Datasheet, ComponentLink2URL=http://www.st.com/internet/com/TECHNICAL_RESOURCES/TECHNICAL_LITERATURE/DATASHEET/CD00227527.pdf, DatasheetVersion=1/03/2009, PackageDescription="6-Pin Plastic, Dual LLP, 3 x 3 mm Body, 0.95 mm Pitch, Exposed Pad", PackageReference=DFN6D, PackageVersion=2008
USB1 USB?: library part CMP-0411-00002-1, "USB, MINI, SMD, RA KME04-USBMU03A01", Manufacturer=Molex, ComponentLink1Description="Manufacturer URL", ComponentLink1URL=http://www.molex.com/, ComponentLink2Description=Datasheet, ComponentLink2URL=http://www.molex.com/pdm_docs/sd/675031020_sd.pdf, DatasheetVersion="Rev F, 06/2009", Mounting Technology="Surface Mount", PackageDescription="Mini USB Connector, SMT, Righer Angle", PackageReference=67503-1020, PartNumber=67503-1020, Terminal Pitch="0.8 mm"
X1 X2: library part XTAL, "Oscillator"

## Via types
v1: diameter 19.68, hole 7.87, Top Layer to Bottom Layer, 2 vias

## Nets (pads, with @x,y where several pads share a name; then routed paths per layer and width w, separated by ;. In a path a pad name is that pad's centre, name@x,y a point inside that pad or via, vN(x,y) a via of type N, cw(c..) or ccw(c..) an arc to the next point about the centre after c; other vN are vias at no path point)
3.3V: C7.2 C8.2 C9.2 C10.2 C12.2 Ca6.2 Cm5.2 Cm6.2 I2C_CON.6 JP1.1 Oa1.4 PWR_CON.3 Qc1.3 Rm4.2 SPI_CON.7 U1.1 U1.13 U1.19 U1.32 U1.48 U1.64 Um2.4
5V: Ca1.2 Ca2.2 Ca3.2 Ca4.2 Ca5.1 Cc2.2 Cc3.2 Cc4.2 Cc5.2 Cc6.1 Cm2.1 Cm3.2 Cm4.2 Ds1.2 Ds2.2 Ds3.2 Ds4.2 Ds5.2 Ds6.2 Ds7.2 Ds8.2 Ds9.2 Ds10.2 Ds11.2 Ds12.2 Ds13.2 Ds14.2 Ds15.2 Ds16.2 Ks1.4 Ks2.4 Ks3.4 Ks4.4 Ks5.4 Ks6.4 Ks7.4 Ks8.4 Ks9.4 Ks10.4 Ks11.4 Ks12.4 Ks13.4 Ks14.4 Ks15.4 Ks16.4 OPTR1.4 OPTR2.4 OPTR3.4 OPTR4.4 OPTR5.4 OPTR6.4 OPTR7.4 OPTR8.4 OPTR9.4 OPTR10.4 OPTR11.4 OPTR12.4 OPTR13.4 OPTR14.4 OPTR15.4 OPTR16.4 PWR_CON.4 Rc9.1 Rm1.2 Rs1.2 Rs3.2 Rs5.2 Rs7.2 Rs9.2 Rs11.2 Rs13.2 Rs15.2 Rs17.2 Rs19.2 Rs21.2 Rs23.2 Rs25.2 Rs27.2 Rs29.2 Rs31.2 Ua1.9 Ua1.10 Ua1.11 Uc1.4 Uc1.20 Um1.2 Um1.4 Um2.1 Um2.6
AnaliserIN: Ks1.1 Ks2.1 Ks3.1 Ks4.1 Ks5.1 Ks6.1 Ks7.1 Ks8.1 Ks9.1 Ks10.1 Ks11.1 Ks12.1 Ks13.1 Ks14.1 Ks15.1 Ks16.1 Ra1.1 Ua1.5
AnaliserOUT: CON2_a1.1 Ua1.6
CS1: SPI_CON.5 U1.20
CS2: SPI_CON.6 U1.41
GND: C1.1 C2.1 C3.1 C4.1 C5.2 C7.1 C8.1 C9.1 C10.1 C12.1 Ca1.1 Ca2.1 Ca3.1 Ca4.1 Ca5.2 Ca6.1 Cc1.1 Cc2.1 Cc3.1 Cc4.1 Cc5.1 Cc6.2 Cm1.2 Cm2.2 Cm3.1 Cm4.1 Cm5.1 Cm6.1 CON2_a1.2 CONs1.2 CONs2.2 CONs3.2 CONs4.2 CONs5.2 CONs6.2 CONs7.2 CONs8.2 CONs9.2 CONs10.2 CONs11.2 CONs12.2 CONs13.2 CONs14.2 CONs15.2 CONs16.2 I2C_CON.1 JP1.3 LEDc2.2 LEDc3.2 LEDm1.2 LEDm2.2 LEDm3.2 Oa1.2 PWR_CON.1 PWR_CON.2 Qs1.2 Qs2.2 Qs3.2 Qs4.2 Qs5.2 Qs6.2 Qs7.2 Qs8.2 Qs9.2 Qs10.2 Qs11.2 Qs12.2 Qs13.2 Qs14.2 Qs15.2 Qs16.2 Rm5.1 SPI_CON.1 SW1.3 SW1.4 SWD.3 SWm1.3 SWm1.4 U1.12 U1.18 U1.31 U1.47 U1.63 Ua1.12 Ua1.13 Ua1.14 Uc1.7 Uc1.18 Uc1.21 Uc1.25 Uc1.26 Um1.1 Um2.2 USB1.5 USB1.6 USB1.7 USB1.8 USB1.9 USB?.5 USB?.6 USB?.7 USB?.8 USB?.9
MCLK: JPa1.1 U1.56
MISO: SPI_CON.3 U1.22
MOSI: SPI_CON.2 U1.23
NetC1_2: C1.2 R1.1 X1.2
NetC2_2: C2.2 R2.1 X1.1
NetC3_2: C3.2 R3.1 X2.1
NetC4_2: C4.2 R4.1 X2.2
NetCc1_2: Cc1.2 Uc1.17
NetCm7_1: Cm7.1 Rm5.2
NetCONs1_1: CONs1.1 Ks1.3
NetCONs2_1: CONs2.1 Ks2.3
NetCONs3_1: CONs3.1 Ks3.3
NetCONs4_1: CONs4.1 Ks4.3
NetCONs5_1: CONs5.1 Ks5.3
NetCONs6_1: CONs6.1 Ks6.3
NetCONs7_1: CONs7.1 Ks7.3
NetCONs8_1: CONs8.1 Ks8.3
NetCONs9_1: CONs9.1 Ks9.3
NetCONs10_1: CONs10.1 Ks10.3
NetCONs11_1: CONs11.1 Ks11.3
NetCONs12_1: CONs12.1 Ks12.3
NetCONs13_1: CONs13.1 Ks13.3
NetCONs14_1: CONs14.1 Ks14.3
NetCONs15_1: CONs15.1 Ks15.3
NetCONs16_1: CONs16.1 Ks16.3
NetDs1_1: Ds1.1 Ks1.5 Qs1.3
NetDs2_1: Ds2.1 Ks2.5 Qs2.3
NetDs3_1: Ds3.1 Ks3.5 Qs3.3
NetDs4_1: Ds4.1 Ks4.5 Qs4.3
NetDs5_1: Ds5.1 Ks5.5 Qs5.3
NetDs6_1: Ds6.1 Ks6.5 Qs6.3
NetDs7_1: Ds7.1 Ks7.5 Qs7.3
NetDs8_1: Ds8.1 Ks8.5 Qs8.3
NetDs9_1: Ds9.1 Ks9.5 Qs9.3
NetDs10_1: Ds10.1 Ks10.5 Qs10.3
NetDs11_1: Ds11.1 Ks11.5 Qs11.3
NetDs12_1: Ds12.1 Ks12.5 Qs12.3
NetDs13_1: Ds13.1 Ks13.5 Qs13.3
NetDs14_1: Ds14.1 Ks14.5 Qs14.3
NetDs15_1: Ds15.1 Ks15.5 Qs15.3
NetDs16_1: Ds16.1 Ks16.5 Qs16.3
NetJP1_2: JP1.2 U1.60
NetJPa1_2: JPa1.2 Oa1.3 Ua1.8
NetJPc1_1: JPc1.1 USB1.1
NetJPc2_1: JPc2.1 SWD.6
NetJPc3_1: JPc3.1 USB?.1
NetLEDc2_1: LEDc2.1 Rc10.1
NetLEDc3_1: LEDc3.1 Rc11.1
NetLEDm1_1: LEDm1.1 Rm1.1
NetLEDm2_1: LEDm2.1 Rm2.1
NetLEDm3_1: LEDm3.1 Rm3.1
NetOPTR1_1: OPTR1.1 Rs1.1
NetOPTR1_3: OPTR1.3 Rs2.1
NetOPTR2_1: OPTR2.1 Rs3.1
NetOPTR2_3: OPTR2.3 Rs4.1
NetOPTR3_1: OPTR3.1 Rs5.1
NetOPTR3_3: OPTR3.3 Rs6.1
NetOPTR4_1: OPTR4.1 Rs7.1
NetOPTR4_3: OPTR4.3 Rs8.1
NetOPTR5_1: OPTR5.1 Rs9.1
NetOPTR5_3: OPTR5.3 Rs10.1
NetOPTR6_1: OPTR6.1 Rs11.1
NetOPTR6_3: OPTR6.3 Rs12.1
NetOPTR7_1: OPTR7.1 Rs13.1
NetOPTR7_3: OPTR7.3 Rs14.1
NetOPTR8_1: OPTR8.1 Rs15.1
NetOPTR8_3: OPTR8.3 Rs16.1
NetOPTR9_1: OPTR9.1 Rs17.1
NetOPTR9_3: OPTR9.3 Rs18.1
NetOPTR10_1: OPTR10.1 Rs19.1
NetOPTR10_3: OPTR10.3 Rs20.1
NetOPTR11_1: OPTR11.1 Rs21.1
NetOPTR11_3: OPTR11.3 Rs22.1
NetOPTR12_1: OPTR12.1 Rs23.1
NetOPTR12_3: OPTR12.3 Rs24.1
NetOPTR13_1: OPTR13.1 Rs25.1
NetOPTR13_3: OPTR13.3 Rs26.1
NetOPTR14_1: OPTR14.1 Rs27.1
NetOPTR14_3: OPTR14.3 Rs28.1
NetOPTR15_1: OPTR15.1 Rs29.1
NetOPTR15_3: OPTR15.3 Rs30.1
NetOPTR16_1: OPTR16.1 Rs31.1
NetOPTR16_3: OPTR16.3 Rs32.1
NetQc1_1: Qc1.1 Rc5.2
NetQc1_2: Qc1.2 Rc8.2 Rc11.2
NetQs1_1: Qs1.1 Rs2.2
NetQs2_1: Qs2.1 Rs4.2
NetQs3_1: Qs3.1 Rs6.2
NetQs4_1: Qs4.1 Rs8.2
NetQs5_1: Qs5.1 Rs10.2
NetQs6_1: Qs6.1 Rs12.2
NetQs7_1: Qs7.1 Rs14.2
NetQs8_1: Qs8.1 Rs16.2
NetQs9_1: Qs9.1 Rs18.2
NetQs10_1: Qs10.1 Rs20.2
NetQs11_1: Qs11.1 Rs22.2
NetQs12_1: Qs12.1 Rs24.2
NetQs13_1: Qs13.1 Rs26.2
NetQs14_1: Qs14.1 Rs28.2
NetQs15_1: Qs15.1 Rs30.2
NetQs16_1: Qs16.1 Rs32.2
NetR1_2: R1.2 U1.3
NetR2_2: R2.2 U1.4
NetR3_2: R3.2 U1.5
NetR4_2: R4.2 U1.6
NetRa1_2: Ra1.2 Ra2.1
NetRa2_2: Ra2.2 Ua1.4
NetRc1_1: Rc1.1 SWD.5
NetRc2_1: Rc2.1 SWD.4
NetRc3_1: Rc3.1 SWD.2
NetRc4_1: Rc4.1 SWD.1
NetRc6_1: Rc6.1 USB?.2
NetRc7_1: Rc7.1 Rc8.1 USB?.3
NetRc9_2: Rc9.2 Uc1.14
NetRc10_2: Rc10.2 Uc1.23
NetUc1_15: Uc1.15 USB1.3
NetUc1_16: Uc1.16 USB1.2
NRST: C5.1 Rc2.2 SW1.1 SW1.2 U1.7
PB0: OPTR15.2 U1.26
PB1: OPTR16.2 U1.27
PB2: Cm7.2 Rm4.1 SWm1.1 SWm1.2 U1.28
PB8: I2C_CON.4 U1.61
PB9: I2C_CON.5 U1.62
PB14: Rm2.2 U1.35
PB15: Rm3.2 U1.36
PC0: OPTR1.2 U1.8
PC1: OPTR2.2 U1.9
PC2: OPTR3.2 U1.10
PC3: OPTR4.2 U1.11
PC4: OPTR5.2 U1.24
PC5: OPTR6.2 U1.25
PC6: OPTR7.2 U1.37
PC7: OPTR8.2 U1.38
PC8: OPTR9.2 U1.39
PC9: OPTR10.2 U1.40
PC10: OPTR11.2 U1.51
PC11: OPTR12.2 U1.52
PC12: OPTR13.2 U1.53
PC13: OPTR14.2 U1.2
SCK: SPI_CON.4 U1.21
SCL: U1.58 Ua1.16
SCL2: I2C_CON.3 U1.29
SDA: U1.59 Ua1.15
SDA2: I2C_CON.2 U1.30
SWO: Rc1.2 U1.55
TCK: Rc4.2 U1.49
TMS: Rc3.2 U1.46
UART_RX: U1.43 Uc1.5
UART_TX: U1.42 Uc1.1
USB_DM: Rc6.2 U1.44
USB_DP: Rc7.2 U1.45
USB_EN: Rc5.1 U1.50
Vin: Cm1.1 JPc1.2 JPc2.2 JPc3.2 Um1.3
pads on no net: Ks1.2 Ks2.2 Ks3.2 Ks4.2 Ks5.2 Ks6.2 Ks7.2 Ks8.2 Ks9.2 Ks10.2 Ks11.2 Ks12.2 Ks13.2 Ks14.2 Ks15.2 Ks16.2 Oa1.1 U1.14 U1.15 U1.16 U1.17 U1.33 U1.34 U1.54 U1.57 Ua1.1 Ua1.2 Ua1.3 Ua1.7 Uc1.2 Uc1.3 Uc1.6 Uc1.8 Uc1.9 Uc1.10 Uc1.11 Uc1.12 Uc1.13 Uc1.19 Uc1.22 Uc1.24 Uc1.27 Uc1.28 Um2.3 Um2.5 Um2.7 USB1.4 USB1.X USB1.Y USB?.4 USB?.X USB?.Y
copper on no net:
  other v1: 8250.72,3297.48 8250.72,3340.79